# Altium PCB BELT-241011A.PcbDoc
Units mil, origin at the board's own origin, x right, y up, seen from the top; angles counter-clockwise.
Board outline 1181.1 x 1694.88 mil, 2 copper layers (Top Layer, Bottom Layer); 58 components, 35 nets, 166 pads, 72 vias.
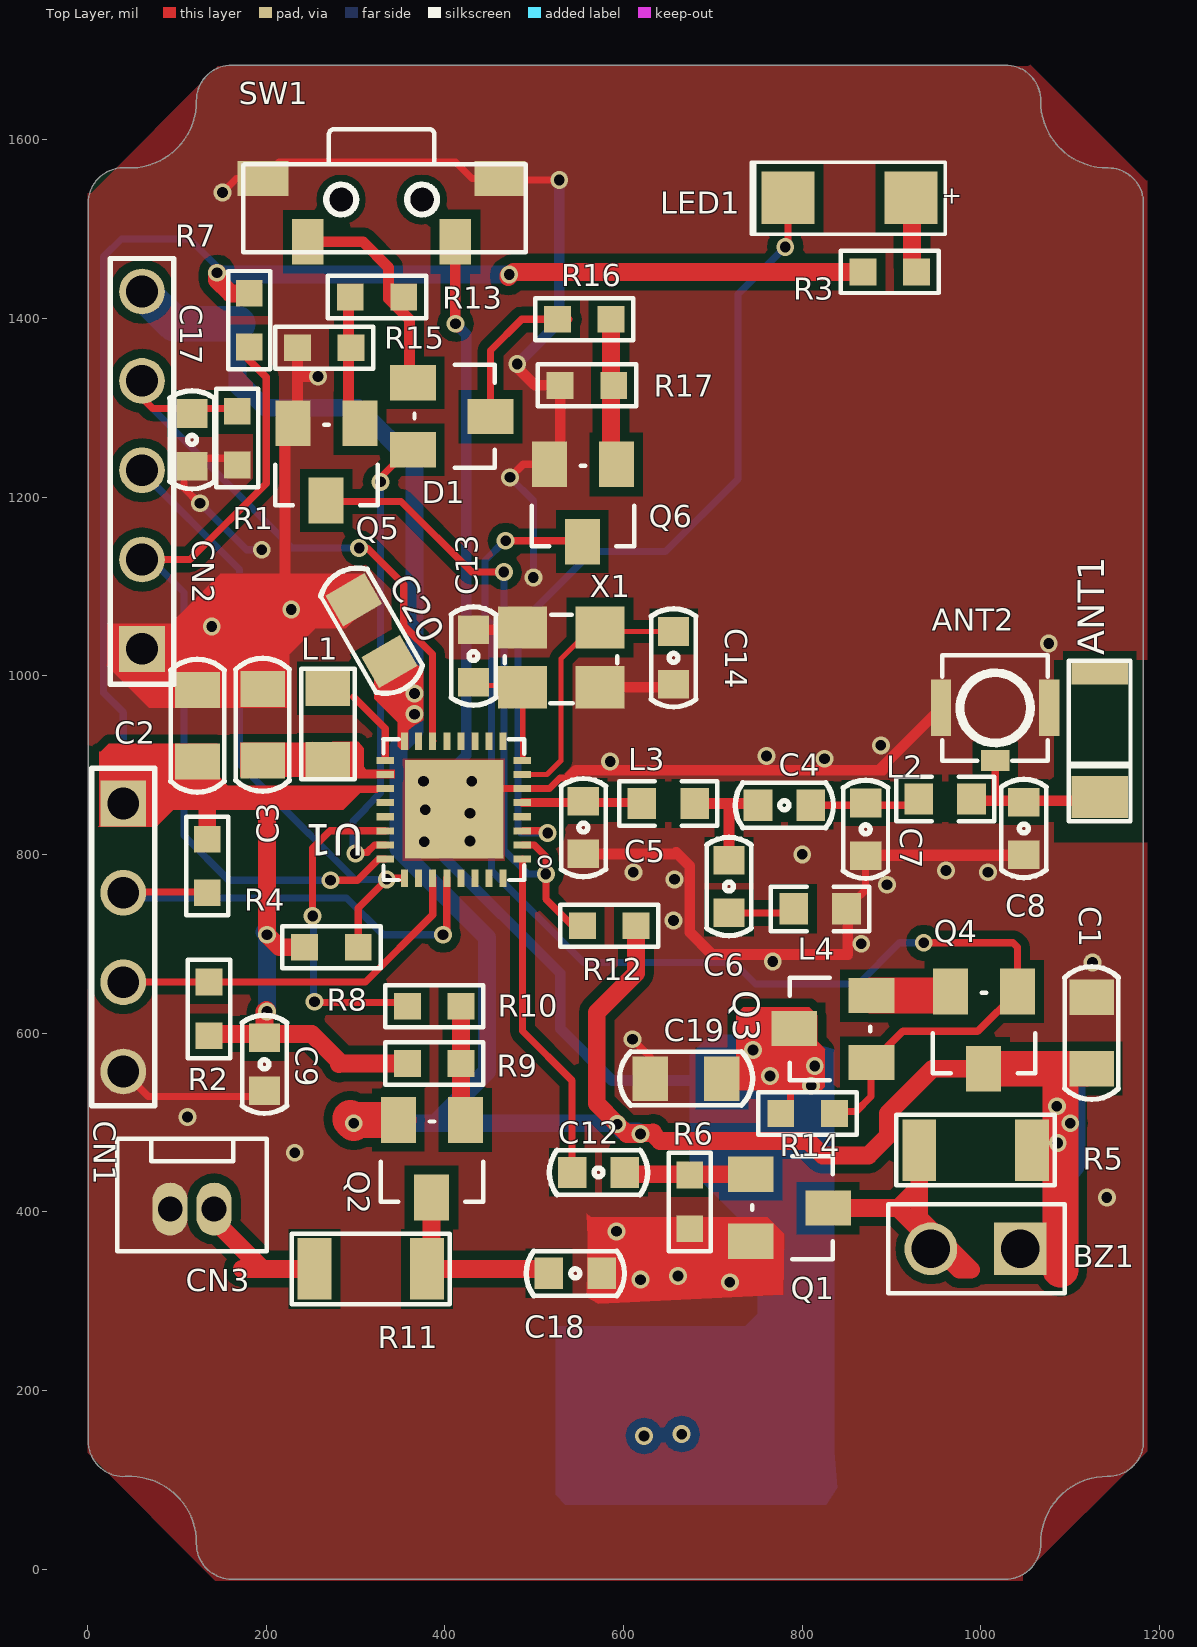
[diagram p0: Top Layer view]
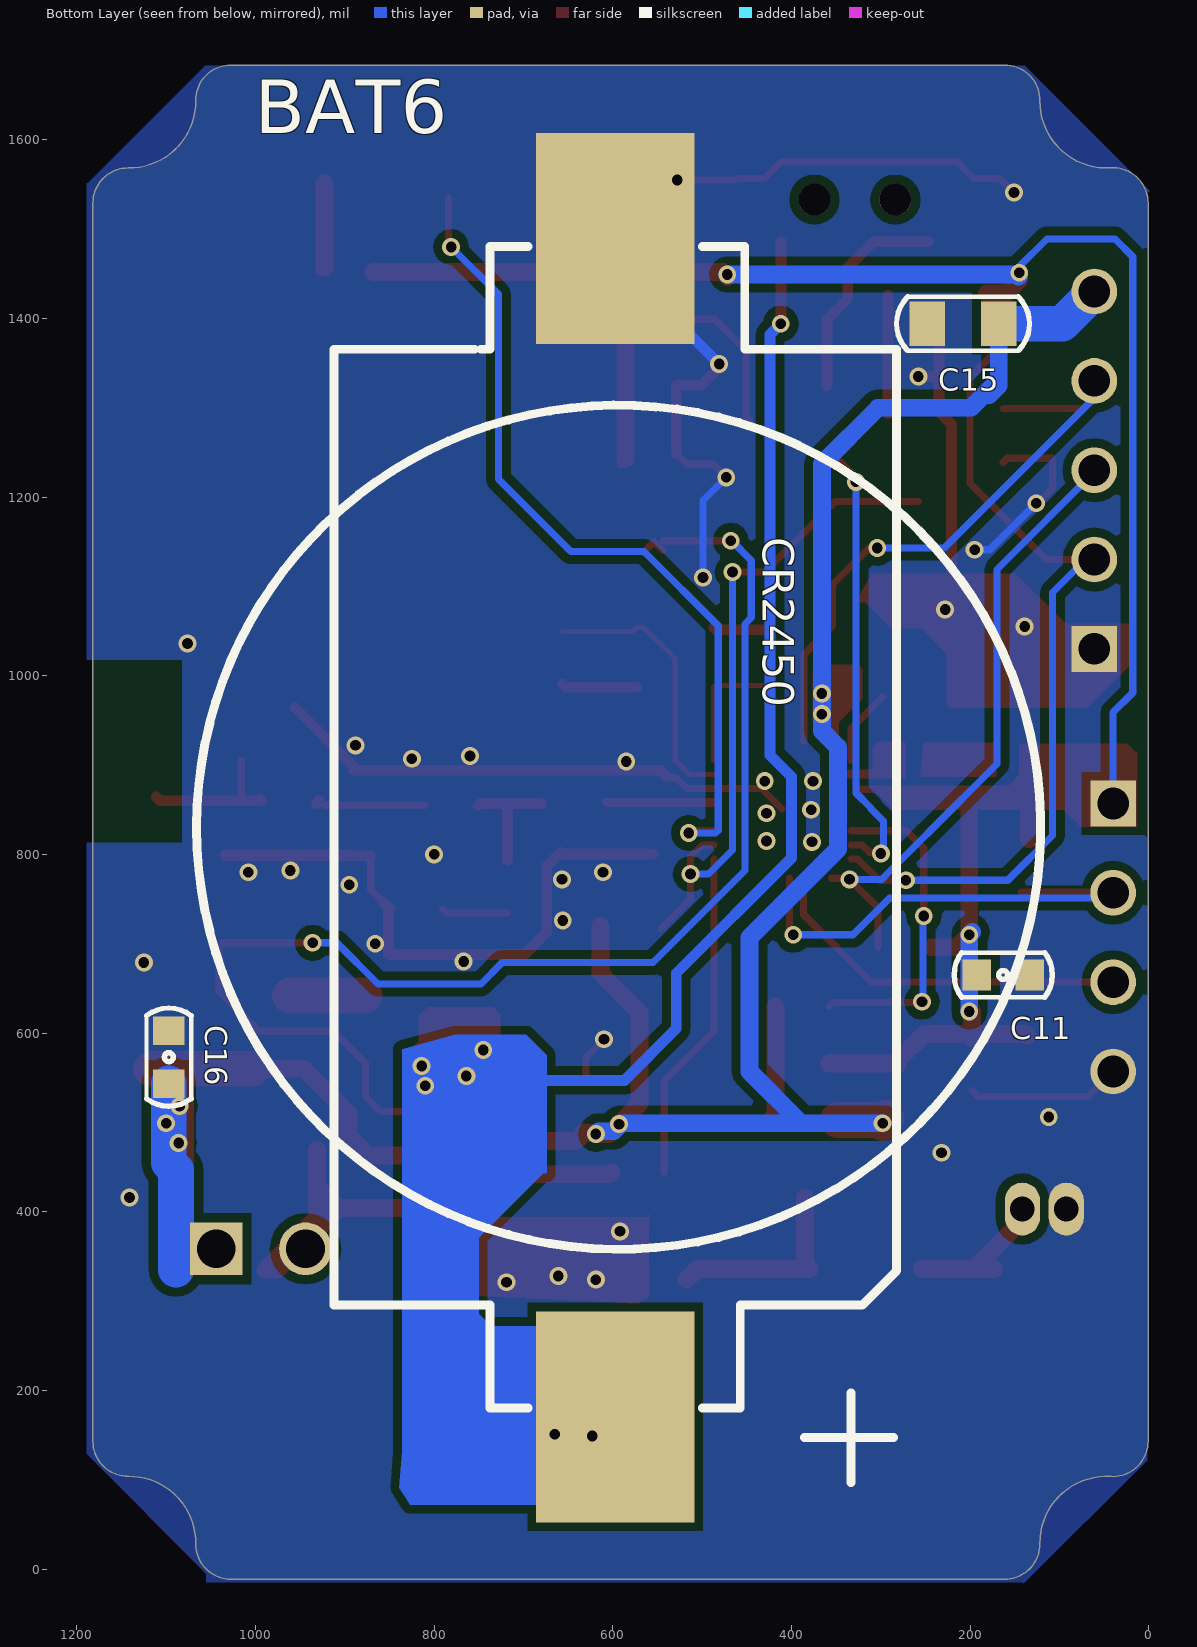
[diagram p1: Bottom Layer view, seen from below]

## Layer stack, top to bottom
Top Solder: solder mask 0.4, Solder Resist, Dk 3.5
Top Layer: signal copper 1.4
Dielectric1: dielectric 12.6, FR-4, Dk 4.8
Bottom Layer: signal copper 1.4
Bottom Solder: solder mask 0.4, Solder Resist, Dk 3.5

## Board outline
42.65,103.66 cw(c47.16,28.99) 121.96,28.34 ccw(c161.33,28.01) 161.33,-11.37 1027.48,-11.37 ccw(c1027.48,28.01) 1066.85,28.34 cw(c1141.65,28.99) 1142.29,103.79 ccw(c1142.63,143.16) 1182,143.16 1182,1528.99 ccw(c1142.63,1528.99) 1142.29,1568.36 cw(c1141.65,1643.16) 1066.85,1643.81 ccw(c1027.48,1644.15) 1027.48,1683.52 161.33,1683.52 ccw(c161.33,1644.15) 121.96,1643.81 cw(c47.16,1643.16) 42.65,1568.5 ccw(c40.27,1529.2) 0.9,1529.2 0.9,142.95 ccw(c40.27,142.95)

## Design rules (kind name [scope] priority, off if disabled: settings)
Clearance Clearance_6 [InNamedPolygon('Bottom Layer-GND')] p1: gap=10 ignorepadtopadclearanceinfootprint=FALSE except(0: Arc-Hole Track-Hole SMDPad-Hole THPad-Hole Via-Hole Fill-Hole Poly-Hole Region-Hole Text-Hole)
Clearance Clearance_5 [InNamedPolygon('Top Layer-GND')] p2: gap=10 ignorepadtopadclearanceinfootprint=FALSE except(0: Arc-Hole Track-Hole SMDPad-Hole THPad-Hole Via-Hole Fill-Hole Poly-Hole Region-Hole Text-Hole)
Clearance Clearance_4 [InNamedPolygon('Top Layer-GND')] p3: gap=10 ignorepadtopadclearanceinfootprint=FALSE except(0: Arc-Hole Track-Hole SMDPad-Hole THPad-Hole Via-Hole Fill-Hole Poly-Hole Region-Hole Text-Hole)
Clearance Clearance_3 [InNamedPolygon('Top Layer-GND')] p4: gap=10 ignorepadtopadclearanceinfootprint=FALSE except(0: Arc-Hole Track-Hole SMDPad-Hole THPad-Hole Via-Hole Fill-Hole Poly-Hole Region-Hole Text-Hole)
Clearance Clearance_2 [InNamedPolygon('Bottom Layer-GND')] p5: gap=10 ignorepadtopadclearanceinfootprint=FALSE except(0: Arc-Hole Track-Hole SMDPad-Hole THPad-Hole Via-Hole Fill-Hole Poly-Hole Region-Hole Text-Hole)
Clearance Clearance_1 [InNamedPolygon('Bottom Layer-GND')] p6: gap=10 ignorepadtopadclearanceinfootprint=FALSE except(0: Arc-Hole Track-Hole SMDPad-Hole THPad-Hole Via-Hole Fill-Hole Poly-Hole Region-Hole Text-Hole)
Clearance QFN46 [HasFootprint('QFN46-6.5X4.5')] p7: gap=4 ignorepadtopadclearanceinfootprint=FALSE except(0: Arc-Hole Track-Hole SMDPad-Hole THPad-Hole Via-Hole Fill-Hole Poly-Hole Region-Hole Text-Hole)
Clearance [All] p8: gap=6 ignorepadtopadclearanceinfootprint=FALSE except(0: Arc-Hole Track-Hole SMDPad-Hole THPad-Hole Via-Hole Fill-Hole Poly-Hole Region-Hole Text-Hole)
ComponentClearance [All] p1 off: gap=10 collisioncheckmode=3 verticalgap=10 showdistances=FALSE
HoleSize [All] p1: absolutevalues=TRUE maxlimit=1000 minlimit=1 maxpercent=80.000 minpercent=20.000
MinimumSolderMaskSliver [All] p1 off: minsoldermaskwidth=4
PolygonConnect dip [InNet('DGND') vs (HasFootprint('CN1.27X4') OR HasFootprint('CN1.27X8-1') OR HasFootprint('SMA_JACK-90'))] p1: connectstyle=Relief reliefconductorwidth=20 reliefentries=4 polygonreliefangle="90 Angle" airgapwidth=10
PolygonConnect [All] p2: connectstyle=Direct reliefconductorwidth=10 reliefentries=4 polygonreliefangle="90 Angle" airgapwidth=10
RoutingVias [All] p1: holewidth=12 width=20 viastyle="Through Hole" minholewidth=12 minwidth=20 maxholewidth=12 maxwidth=20
SilkToSilkClearance [All] p1 off: silktosilkclearance=10
SilkToSolderMaskClearance SilkscreenOverComponentPads [IsPad] p1 off: minsilkscreentomaskgap=10 clearancetoexposedcopper=TRUE
SolderMaskExpansion [All] p1 off: expansion=4
Width [All] p1: maxlimit=100 minlimit=6 preferedwidth=10
25 further rules are at their usual default settings.

## Components (designator, comment, footprint, x,y, rotation, side; value= is the part's Value field where it differs from the comment)
ANT1 "Chip ANT" ANT-AA055A 1133,939 r90 top
ANT2 "NC/RF_CON_3P" RF-CON 1016,964 r90 top
BAT6 "Comment" CR2450_HOLDER 621,824 r270 bottom
BZ1 "BUZZER" CONN2P 1044,358.5 r270 top
C1 "10UF" c0805 1124,640 r270 top
C2 "10uF" C0805 123,984 r270 top
C3 "10uF" C0805 196,985 r270 top
C4 "18P" C0603 780,855 r0 top
C5 "1PF" C0603 555,830 r270 top
C6 "0.5P" C0603 718,764 r270 top
C7 "1.5PF" C0603 871,828 r270 top
C8 "2PF" C0603 1048,829 r270 top
C9 "0.1UF" C0603 198,565 r270 top
C11 "2.2UF" C0603 163,665 r180 bottom
C12 "2.2UF" C0603 572,444 r0 top
C13 "18PF" C0603 432,1022 r90 top
C14 "18PF" C0603 656,1020 r270 top
C15 "10uF" C0805 168,1394 r0 bottom
C16 "2.2UF" C0603 1097,573 r90 bottom
C17 "0.1UF" C0603 117,1264 r270 top
C18 "0.1UF" C0603 546,331 r0 top
C19 "10uF" C0805 630,549 r0 top
C20 "10uF" C0805 298,1085 r300 top
CN1 "NC/4P/2.54mmSIP" SIP4X2.54 40,857 r270 top
CN2 "NC/CON5" SIP5X2.54 61,1030 r90 top
CN3 "2P/1.27mm/180" CN1.25X2 117,403 r0 top
D1 "BAT54C" SOT23 451,1290 r270 top
L1 "10UH" L0805 269,906 r90 top
L2 "0R" L0603 960,862 r0 top
L3 "2nH" L0603 650,857 r0 top
L4 "3.9nH" L0603 820,739 r0 top
LED1 "紅光" LED-1206 853,1535 r180 top
Q1 "MMBT3904" SOT23-MOS 829,404 r270 top
Q2 "MMBT3906" SOT23-MOS 385,416 r180 top
Q3 "SPP2301A" SOT23-MOS 791,605 r90 top
Q4 "SPP2301A" SOT23-MOS 1003,560 r180 top
Q5 "MMBT3904" SOT23-MOS 267,1196 r180 top
Q6 "MMBT3904" SOT23-MOS 554,1150 r180 top
R1 "1K" R0603 167.54,1266 r270 top
R2 "100K" R0603 136,627 r90 top
R3 "1K" R0603 898,1452 r0 top
R4 "100K" R0603 134,787 r270 top
R5 "330R" R1206 994,469 r0 top
R6 "100K" R0603 674,411 r270 top
R7 "100K" R0603 181,1398 r270 top
R8 "100K" R0603 273,696 r0 top
R9 "1M" R0603 388,566 r180 top
R10 "1K" R0603 388,630 r0 top
R11 "33 Ohm" R1206 317,336 r180 top
R12 "100K" R0603 584,720 r0 top
R13 "1K" R0603 324,1424 r180 top
R14 "100K" R0603 806,510 r0 top
R15 "100K" R0603 265,1367 r180 top
R16 "1K" R0603 556,1399 r0 top
R17 "100K" R0603 559,1325 r180 top
SW1 "DTSA-63N/K-V" SW7X2.5 329,1533 r0 top
U1 "FR8016HA" QFN32-4X4 410,850 r180 top
X1 "24MHz" XTAL3225 487,987 r180 top

## Footprints (in the part's own frame and the unit in brackets; to place one, negate y for a bottom-side part, rotate by r counter-clockwise, add the part's x,y. Pads: shape width x height; smd on the part's side, far side on the other; paste and mask are expansions set on the pad)
ANT-AA055A [mm] "190712"
  rect 1.2x1.6 smd: 1(-1.9,0)
  rect 0.7x1.6 smd: 2(1.65,0)
  Multi-Layer pour cut-out: -3.2,1.3 -3.2,-3.701 2.001,-3.701 2.001,1.3
  silkscreen extent -2.59,-0.87 1.97,0.87
C0603 [mil]
  rect 32x35 smd: 1(-29.53,0) 2(29.53,0)
  silkscreen extent -55,-25 55,25
c0805 [mil] "1.2mm"
  rect 40x50 smd: 1(0,0) 2(80,0)
  silkscreen extent -34,-30 114,30
C0805 [mil] "1.2mm"
  rect 40x50 smd: 1(0,0) 2(80,0)
  silkscreen extent -34,-30 114,30
CN1.25X2 [mm]
  oval 1x1.5 hole 0.7: 1(-0.625,0) 2(0.625,0)
  silkscreen extent -2.12,-1.2 2.13,2
CONN2P [mm]
  rect 1.5x1.5 hole 1.1: 1(0,0)
  round 1.5 hole 1.1: 2(0,-2.54)
  silkscreen extent -1.27,-3.75 1.27,1.27
CR2450_HOLDER [mm]
  rect 6x4.5 smd: 1(16.6,0.6) 2(-16.9,0.6)
  silkscreen extent -16.67,-11.3 18.47,12.7
L0603 [mil]
  rect 32x35 smd: 1(-29.53,0) 2(29.53,0)
  silkscreen extent -55,-25 55,25
L0805 [mil]
  rect 40x50 smd: 1(0,0) 2(80,0)
  silkscreen extent -22,-30 102,30
LED-1206 [mm]
  rect 1.5x1.5 smd: 1(-1.75,0) 2(1.75,0)
  silkscreen extent -2.72,-1.02 2.79,1.04
QFN32-4X4 [mm] "190410"
  rect 0.5x0.2 smd: 1(-1.95,1.4) 2(-1.95,1) 3(-1.95,0.6) 4(-1.95,0.2) 5(-1.95,-0.2) 6(-1.95,-0.6) 7(-1.95,-1) 8(-1.95,-1.4) 17(1.95,-1.4) 18(1.95,-1) 19(1.95,-0.6) 20(1.95,-0.2) 21(1.95,0.2) 22(1.95,0.6) 23(1.95,1) 24(1.95,1.4)
  rect 0.2x0.5 smd: 9(-1.4,-1.95) 10(-1,-1.95) 11(-0.6,-1.95) 12(-0.2,-1.95) 13(0.2,-1.95) 14(0.6,-1.95) 15(1,-1.95) 16(1.4,-1.95) 25(1.4,1.95) 26(1,1.95) 27(0.6,1.95) 28(0.2,1.95) 29(-0.2,1.95) 30(-0.6,1.95) 31(-1,1.95) 32(-1.4,1.95)
  rect 2.8x2.8 smd: 33(-0.017,-0.017)
  silkscreen extent -2,-2 2,2
R0603 [mil]
  rect 30x30 smd: 1(-30,0) 2(30,0)
  silkscreen extent -55,-24 55,24
R1206 [mil]
  rect 38x69 smd: 1(-63,0) 2(63,0)
  silkscreen extent -89,-39 89,39
RF-CON [mm]
  rect 0.6x0.8 smd: 1(-1.5,0)
  rect 1.6x0.571 smd: 2(0,1.536) 3(0,-1.536)
  silkscreen extent -1.5,-1.5 1.5,1.5
SIP4X2.54 [mm]
  rect 1.3x1.3 hole 0.9: 1(0,0)
  round 1.3 hole 0.9: 2(2.54,0) 3(5.08,0) 4(7.62,0)
  silkscreen extent -1,-0.9 8.6,0.9
SIP5X2.54 [mm]
  rect 1.3x1.3 hole 0.9: 1(0,0)
  round 1.3 hole 0.9: 2(2.54,0) 3(5.08,0) 4(7.62,0) 5(10.16,0)
  silkscreen extent -1,-0.9 11.1,0.9
SOT23 [mm]
  rect 1x1.3 smd: 1(-0.965,-2.2) 2(0.94,-2.2) 3(0,0)
  silkscreen extent -1.47,-2.16 1.45,0.13
SOT23-MOS [mm]
  rect 1x1.3 smd: 1(-0.965,-2.2) 2(0.94,-2.2) 3(0,0)
  silkscreen extent -1.47,-2.16 1.45,0.13
SW7X2.5 [mm]
  rect 0.9x1.3 smd: 1(-2.1,-1.2) 2(2.1,-1.2)
  rect 1.45x1 smd: 3(-3.375,0.6) 4(3.375,0.6)
  round 0.9 hole 0.9 unplated: 5(-1.15,0) 6(1.15,0)
  silkscreen extent -3.93,-1.5 4.11,2
XTAL3225 [mm]
  rect 1.4x1.2 smd: 1(0,0) 2(-2.2,0) 3(-2.2,-1.7) 4(0,-1.7)
  silkscreen extent -2.69,-2.06 0.51,0.46

## Part data
LED1: library part ¬õ?

## Via types
v1: diameter 20, hole 12, Top Layer to Bottom Layer, tented both sides, 72 vias

## Nets (pads, with @x,y where several pads share a name; then routed paths per layer and width w, separated by ;. In a path a pad name is that pad's centre, name@x,y a point inside that pad or via, vN(x,y) a via of type N, cw(c..) or ccw(c..) an arc to the next point about the centre after c; other vN are vias at no path point)
3V: BZ1.1 C1.2 C15.1 C16.1 C20.2 CN2.5 Q2.2 Q4.3 R5.2 R12.2 U1.16 | length 3001.5
  Top Layer w8: U1.16 354.88,976.88 355,977 ; C1.2@1117,560 C1.2@1123,566
  Top Layer w20: R12.2 614,667 570,623 570,521 v1(593,498) 603,488 ; v1(619,487) 604,487 603,488 ; 633,489 632,488 ; Q4.3 945.87,560 896,510.13 896,485 874,463 823,463 807,479 641,479 632,488 ; 603,488 632,488
  Top Layer w40: v1(298,499) 294,503 294,505 296.39,502.61 Q2.2 ; Q4.3 1095,560 ; 1089,335 1089,554 1095,560 ; C1.2@1117,560 1095,560
  Bottom Layer w20: 168,1331 199,1300 303,1300 366,1237 v1(366,980) v1(366,957) 366,938 348,920 348,806 447,707 447,557 389,499 ; C15.1 168,1325 179,1314 ; v1(298,499) 389,499 ; v1(619,487) 616,490 599,490 590,499 389,499
  Bottom Layer w40: CN2.5 97,1394 C15.1 ; 1089,335 1089,446.91 1097,454.91 C16.1
  other v1: 1086,477 1100,499 1085,518
BEEP: C12.1 U1.1 | length 374.6
  Top Layer w8: U1.1 486.77,755.23 ; 487,721 486.77,721.23 ; 487,755 486.77,755.23 ; C12.1 542.47,546.53 486.77,602.23 486.77,721.23 ; 486.77,721.23 486.77,755.23
BFB: C3.2 L1.1 U1.18
BSW: L1.2 U1.17 | length 85.5
  Top Layer w8: 298,976 333.23,940.77 U1.17
GND: ANT2.2 ANT2.3 BAT6.2 C1.1 C2.1 C3.1 C5.2 C7.2 C8.2 C9.2 C11.2 C13.2 C14.2 C15.2 C16.2 C17.2 C18.2 C19.1 C20.1 CN1.4 CN2.1 CN3.1 L4.2 Q1.2 Q5.2 Q6.2 R1.2 R6.2 R15.2 R17.2 SW1.3 SW1.4 U1.6 U1.33 X1.2 X1.4 | length 3263.6
  Top Layer w8: CN1.4 68,529 191.53,529 C9.2 ; v1(126,1193) 125,1193 108,1210 108,1243.47 158.53,1243.47 R1.2@163,1239 ; v1(151,1541) 166.62,1556.62 SW1.3 214.5,1575 412,1575 430.38,1556.62 SW1.4 463.5,1555 v1(528,1555) ; 215,1091 217,1091 219,1089 221,1091 ; U1.33 433.62,873.62 U1.6 517.01,873.62 528.91,885.53 538,885.53 540,887.53 ; v1(473,1222) 487.61,1236.61 Q6.2 Q6.2@529,1248.61 ; v1(610,593) 630,573 C19.1 ; L4.2 851,740.47 857.53,747 871,760.47 C7.2
  Top Layer w12: 221,1091 221,1281.61 235,1295.61 235,1335 ; R15.2 235,1335 ; v1(258,1335) 235,1335 ; C13.2@422,1051.53 484.6,1051.53 X1.4 ; v1(481,1349) 483,1349 484,1348 484,1342 501,1325 R17.2 Q6.2@529,1248.61 ; 540,887.53 546.71,894.24 890.24,894.24 ; C5.2 657.47,800.47 659,802 674,787 674,713 699,688 851,688 L4.2@851,740.47 ; X1.2 652.53,987 C14.2 ; L4.2 L4.2@857.53,747 ; C7.2 890.47,798.47 ; 888.01,896.47 ANT2.2 ; 891.47,798.47 891.47,799.47 1034,799.47 1033,798.47 891.47,798.47
  Bottom Layer w8: v1(126,1193) 178,1141 v1(195,1141) ; v1(473,1222) 499,1196 v1(499,1110)
  Bottom Layer w12: v1(481,1349) 528,1396 v1(528,1555)
  other v1: 719,321 619,324 661,328 592,378 1141,416 232,466 112,506 1125,679 767,680 866,700 656,726 895,766 657,772 611,780 1008,780 961,782 800,800 377,814 428,815 428,846 378,850 376,882 430,882 585,904 825,907 760,910 888,922 1076,1036 139,1055 228,1074
ICE_RST: C17.1 CN2.4 R1.1 U1.14 | length 719.9
  Top Layer w8: CN2.4@42,1330 73,1299 R1.1@163,1299 ; v1@313,1143 354,1102 354,1056 386,1024 386,927.15 U1.14
  Bottom Layer w8: CN2.4@42,1330 229,1143 v1(304,1143)
MOTOR_CTRL: R10.1 U1.22 | length 364.3
  Top Layer w8: v1(252,731) 252,807 271.38,826.38 U1.22 ; v1@254,634 354,634 R10.1
  Bottom Layer w8: v1@253,728 253,636 v1(254,635)
N16462389: ANT1.1 ANT2.1 C8.1 L2.2 | length 167.9
  Top Layer w8: ANT2.1 1016,861 1017,860
  Top Layer w12: L2.2@995,862 993,860 1017,860 1106.8,860 ANT1.1@1111,864.2
N16763808: C5.1 L3.1 U1.5 | length 123.6
  Top Layer w6: L3.1@607.35,857.87 L3.1@609.47,860
  Top Layer w10: U1.5 L3.1@607.35,857.87
N16764312: C6.2 L4.1 | length 74.3
  Top Layer w8: C6.2 785.95,734.47 L4.1
N16764395: C4.1 C6.1 L3.2 | length 135.7
  Top Layer w12: L3.2 717,857 ; C6.1 718,856 717,857 ; C4.1 748.47,857 717,857
N16764674: C4.2 C7.1 L2.1 | length 128.1
  Top Layer w8: C4.2 923.47,855 L2.1
  Top Layer w12: L2.1@929,860 L2.1@932,857
N16877461: LED1.2 U1.3 | length 944.6
  Top Layer w8: U1.3 512.62,826.38 v1(515,824) ; v1(781,1480) 784.1,1483.1 LED1.2
  Bottom Layer w8: v1(515,824) 485,824 482,827 482,1056 565,1139 647,1139 728,1220 728,1427 v1(781,1480)
N16877556: LED1.1 R3.2 | length 101.1
  Top Layer w8: R3.2@922.9,1457.1 R3.2
  Top Layer w20: R3.2@922.9,1457.1 LED1.1@922.9,1551
N16877837: Q2.1 R9.1 R10.2 | length 129.5
  Top Layer w20: R10.2 R9.1 418,507.61 Q2.1
N16877854: C18.1 Q2.3 R11.1 | length 224.5
  Top Layer w20: Q2.3 385,341 R11.1 505.47,336 C18.1@517.47,324
N16877874: CN3.2 R11.2 | length 171.9
  Top Layer w8: 172,337 173,336
  Top Layer w20: CN3.2 141.61,390.39 196,336 ; 173,336 196,336 ; R11.2 196,336
N16878191: C12.2 Q1.1 R6.1 | length 141.7
  Top Layer w20: C12.2 603.53,442 Q1.1
N16878201: BZ1.2 Q1.3 R5.1 | length 380.5
  Top Layer w20: Q1.3 907,404 ; R5.1 931,428 ; 907,404 931,428 ; 907,404 976,335 989,335 931,393 931,428
N16878565: Q5.1 R13.2 R15.1 | length 132.4
  Top Layer w12: Q5.1@292,1293.61 292,1361 R13.2@292,1426
N16878591: D1.1 R13.1 SW1.1 | length 245.3
  Top Layer w12: SW1.1 308.24,1485.76 337,1457 337,1422 360.39,1398.61 D1.1@360.39,1324
N16879260: Q3.2 Q4.2 | length 90.3
  Top Layer w8: Q4.2@961.39,642 Q4.2
  Top Layer w40: Q3.2 Q4.2@961.39,642
N16879262: Q3.1 Q4.1 Q6.3 R14.2 | length 1483.9
  Top Layer w8: v1(468,1151) Q6.3@544,1151 ; Q6.3@544,1140 Q6.3 Q6.3@566,1138 ; R14.2@836,512 860,512 877,529 877,566.39 Q3.1 912.61,602 996.39,602 Q4.1 1041,696 1036,701 v1(936,701)
  Bottom Layer w8: v1(468,1151) 467,1151 445,1129 445,1065 452,1058 452,782 555,679 723.72,679 747.72,655 863,655 909,701 v1(936,701)
N16879300: Q6.1 R16.2 R17.1 | length 164.9
  Top Layer w8: Q6.1@586,1242.61 Q6.1
  Top Layer w20: Q6.1@586,1242.61 R16.2
PWR-EN: D1.3 R16.1 | length 182.2
  Top Layer w8: D1.3@447,1286 D1.3 451,1364 486,1399 R16.1@539,1399
PWR-GPIO: D1.2 U1.23 | length 510.2
  Top Layer w8: v1(300,801) 301,802 313.37,802 ; 313.39,802.02 313.39,802.96 321.05,810.63 U1.23 ; v1(328,1217) 328,1222 355,1249 D1.2@360.39,1249
  Bottom Layer w8: v1@297,806 297,837 311,851 311,852 328,869 v1(328,1217)
PWRKEY: Q5.3 R12.1 U1.2 | length 735.9
  Top Layer w8: Q5.3@258,1195 351,1195 430,1116 v1(466,1116) ; U1.2 500.09,810.63 513,797.72 513,750 R12.1@546,717
  Bottom Layer w8: v1(466,1116) 466,805 493,778 v1(513,778)
SW_DIO: CN2.2 R7.2 U1.24 | length 953.8
  Top Layer w8: CN2.2@42,1130 CN2.2 114.82,1130 200,1215.18 200,1334 R7.2@177,1357 ; v1(272,771) 302.17,771 326.05,794.88 U1.24
  Bottom Layer w8: CN2.2@42,1130 CN2.2 71,1130 108,1093 108,821 158,771 v1(272,771)
SW_TCK: CN2.3 R8.2 U1.25 | length 721.4
  Top Layer w8: R8.2 303,740 v1(335,772) 336.23,773.23 U1.25
  Bottom Layer w8: CN2.3@42,1230 59,1230 170,1119 170,901 248,823 ; 247.28,824 292,779.28 292,779 299,772 v1(335,772)
UART-RX: CN1.2 R4.2 U1.28 | length 545.8
  Top Layer w8: CN1.2 41,758 R4.2@143,758 ; v1(398,710) 402.13,714.13 U1.28
  Bottom Layer w8: CN1.2 46,751 290,751 331,710 v1(398,710)
UART-TX: CN1.3 R2.2 U1.27 | length 418.5
  Top Layer w8: CN1.3 311,657 386.38,732.38 U1.27
VBAT: BAT6.1 C19.2 Q3.3 R14.1 SW1.2 | length 1314.6
  Top Layer w8: R14.1@787,512 787,601 Q3.3
  Top Layer w12: SW1.2 411.68,1392.32 414,1390 414,1392 v1(412,1394)
  Bottom Layer w12: v1(412,1394) 424,1382 424,911 400,887 400,796 529,667 529,605 587,547 759,547 v1(764,552)
  other v1: 623,149 665,151 810,541 814,563 745,581
VDD-IO: C2.2 C9.1 C11.1 CN1.1 R2.1 R3.1 R4.1 R7.1 R8.1 R9.2 U1.19 | length 2178.4
  Top Layer w8: CN1.1 CN1.1@44,853 ; 129,869 134,864 ; 281.53,565 282.53,566
  Top Layer w20: R4.1 134,864 ; R2.1 138,599 C9.1@198,599 ; v1(145,1451) 145,1443 160,1428 R7.1 ; C9.1 C9.1@198,599 ; v1(201,624) 201,625 200,626 198,624 C9.1@198,599 ; 201,856 v1(201,710) 215,696 R8.1 ; 281.53,565 281.53,568.47 251,599 C9.1@198,599 ; 282.53,566 R9.2 ; v1(472,1449) 471,1448 471,1446 477,1452 R3.1
  Bottom Layer w8: CN1.1 40,959 18,981 18,1469 38,1489 114,1489 145,1458 v1(145,1451)
  Bottom Layer w20: v1(145,1451) 145,1448 146,1447 148,1449 v1(472,1449) ; v1@198,713 v1(201,710) v1(201,624)
XI: C13.1 U1.8 X1.1 | length 143.8
  Top Layer w6: C13.1@426,989 485,989 X1.1 487,905.35 U1.8
XO: C14.1 U1.7 X1.3 | length 306
  Top Layer w6: U1.7 514.37,889.37 530,905 530,1019 564.93,1053.93 X1.3 578.02,1049.53 C14.1
pads on no net: ANT1.2 SW1.5 SW1.6 U1.4 U1.9 U1.10 U1.11 U1.12 U1.13 U1.15 U1.20 U1.21 U1.26 U1.29 U1.30 U1.31 U1.32

## Polygon pours and split planes (outlines as drawn)
GND on Top Layer "Top Layer-GND" (solid, remove dead copper, pour order 0): 148,1684 4,1540 0,1540 0,130 143,-13 1047,-13 1047,-7 1186,132 1186,1554 1185,1554 1055,1684 1053,1682 145,1682
GND on Bottom Layer "Bottom Layer-GND" (solid, remove dead copper, pour order 2): 145,1684 140,1684 -1,1543 2,1540 2,122 140,-16 141,-15 1055,-15 1055,-5 1189,129 1189,1551 1188,1551 1056,1683 138,1683

## Other copper
Top Layer:
  region net VDD-IO: 325,877 157,877 145,889 145,924 24,924 15,915 13,915 13,832 12,831 77,831 96,850 286,850 305,869 325,869
  region net BFB: 252,926 251,925 171,925 171,887 255,887 256,888
  region net BFB: 272,885 272,923 274,926 303,926 309,919 309,898 312,895 344,895 344,885
  pour cut-out: 503.47,882 501.5,880.03 501.5,836.03 1111.5,836.03 1170,838 1171,855 1172,880 1064.5,880.03 1062.53,882
  region net 3V: 359,939 365,944 376,950 376,1005 369,1012 325,1012 321,1008 321,974 347,948 347,921 351,917 359,917
  region net GND: 560,372 559,304 572,297 779,307 780,375 761,394 563,394 559,398
  region net GND: 310,1114 149,1114 93,1058 22,1058 22,1013 21,1012 69,964 223,964 226,967 226,1024 255,1053 289,1053 318,1082 328,1082
  region net VBAT: 817,620 817,591 826,582 825,581 825,540 817,532 813,536 725,536 726,557 726,621 734,629 808,629
Bottom Layer:
  region net VBAT: 777,598 697,598 674,575 674,443 678,443 750,371 750,286 736,272 524,272 524,83 535,72 827,72 839,91 836,131 836,582

## Silkscreen, mask and mechanical layers (free items; w line width, h text height)
Mechanical 1:
  lines w0.5: -2894.75,-2552.2 8798.16,-2552.2 8798.16,5715.52 -2894.75,5715.52 -2894.75,-2552.2 ; 0.9,142.95 ccw(c40.27,142.95) 42.65,103.66 cw(c47.16,28.99) 121.96,28.34 ccw(c161.33,28.01) 161.33,-11.37 1027.48,-11.37 ccw(c1027.48,28.01) 1066.85,28.34 cw(c1141.65,28.99) 1142.29,103.79 ccw(c1142.63,143.16) 1182,143.16 1182,1528.99 ccw(c1142.63,1528.99) 1142.29,1568.36 cw(c1141.65,1643.16) 1066.85,1643.81 ccw(c1027.48,1644.15) 1027.48,1683.52 161.33,1683.52 ccw(c161.33,1644.15) 121.96,1643.81 cw(c47.16,1643.16) 42.65,1568.5 ccw(c40.27,1529.2) 0.9,1529.2 0.9,142.95

## Text inside footprints (layer, text, board x,y; h text height)
BAT6: Bottom Overlay "CR2450" at 443.83,1154.71 h60 r90
LED1: Top Overlay "+" at 979,1545 h20 r180
U1: Top Overlay "o" at 519.84,800.35 h20 r90